# Altium PCB pcb.PcbDoc (part 3 of 6)
Units mm, origin at the board's own origin, x right, y up, seen from the top; angles counter-clockwise.
Board outline 163.6 x 137.4 mm, 4 copper layers (Top Layer, GND2, GND3, Bottom Layer), stack 1.586 mm thick; 362 components, 323 nets, 1261 pads, 657 vias.
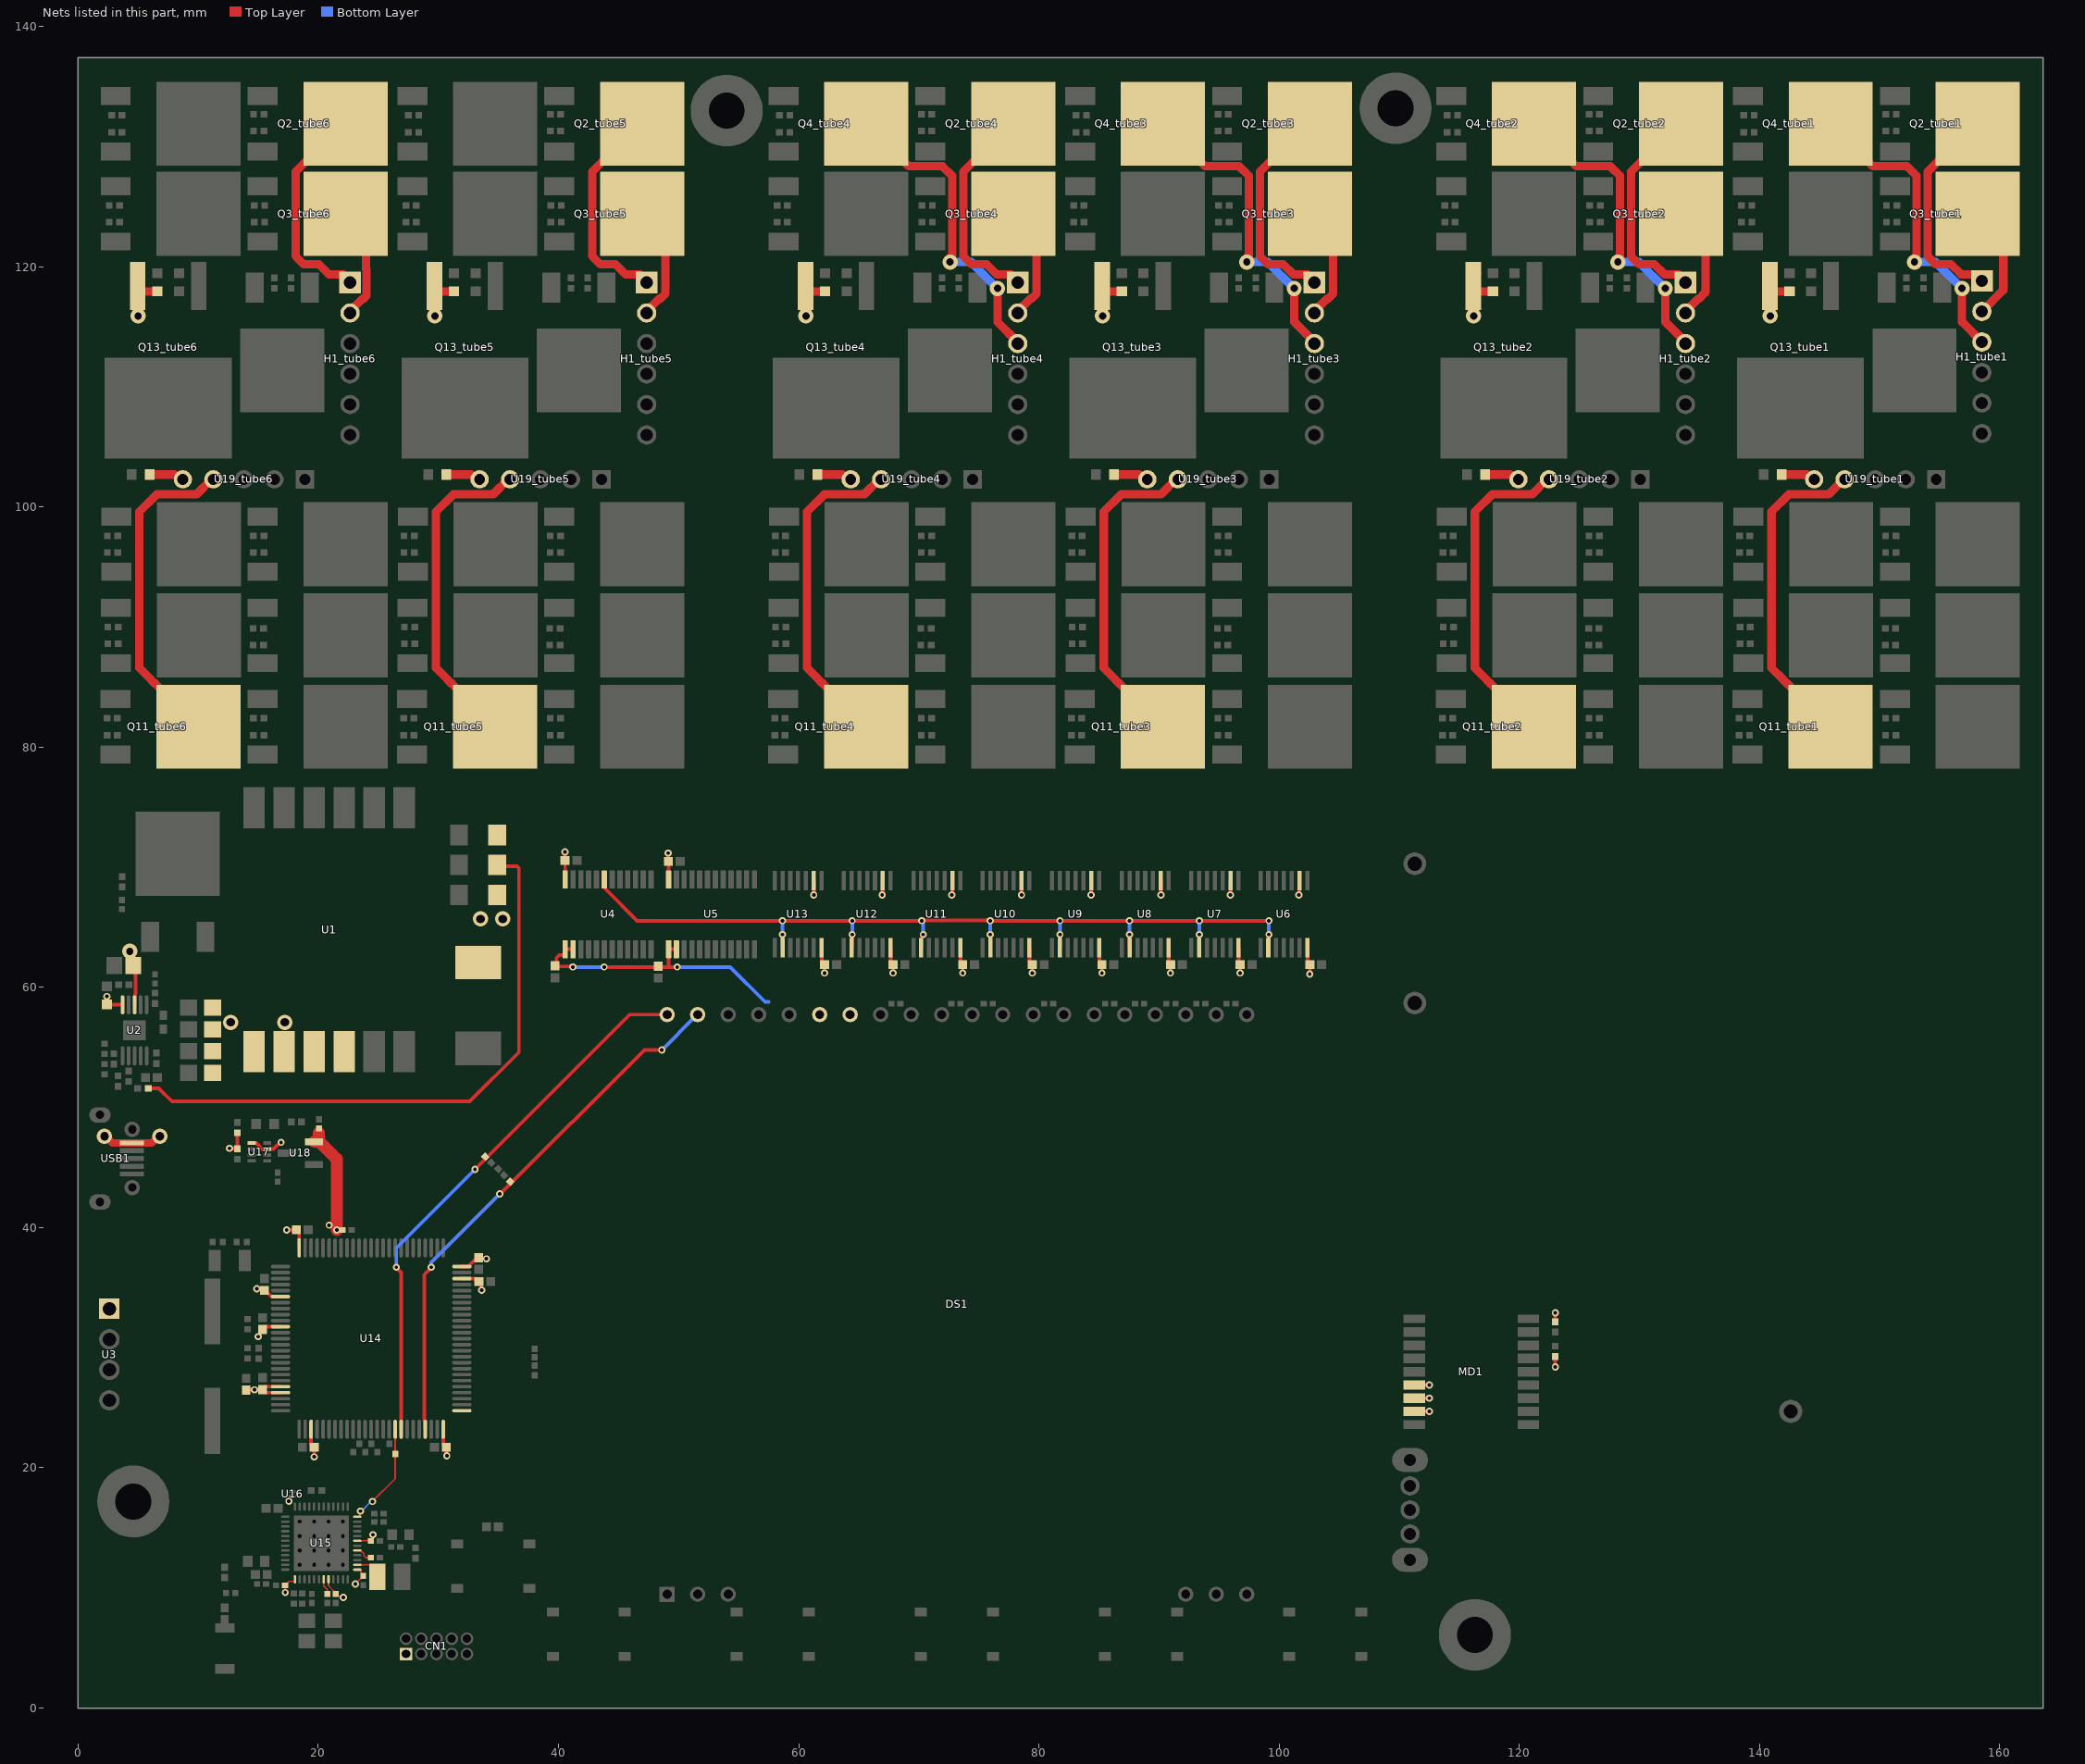
[diagram p4: the nets of this part, all layers, seen from the top]

## Via types
v1: diameter 0.6, hole 0.3, Top Layer to Bottom Layer, 545 vias
v2: diameter 1.27, hole 0.6, Top Layer to Bottom Layer, 97 vias
v3: diameter 1.27, hole 0.711, Top Layer to Bottom Layer, 13 vias
v4: diameter 0.5, hole 0.2, Top Layer to Bottom Layer, 2 vias

## Nets (pads, with @x,y where several pads share a name; then routed paths per layer and width w, separated by ;. In a path a pad name is that pad's centre, name@x,y a point inside that pad or via, vN(x,y) a via of type N, cw(c..) or ccw(c..) an arc to the next point about the centre after c; other vN are vias at no path point) (continued)
AN_COMMON_tube5: R35_tube5.2 U19_tube5.5 | length 2.9
  Top Layer w0.7: R35_tube5.2@30.653,102.7 32.732,102.7 33.127,102.304 U19_tube5.5@33.35,102.304
AN_COMMON_tube6: R35_tube6.2 U19_tube6.5 | length 2.9
  Top Layer w0.7: R35_tube6.2@5.953,102.7 8.032,102.7 8.427,102.304 U19_tube6.5@8.65,102.304
BUCKOUT: L1.1 U15.26 | length 2.3
  Top Layer w0.127: U15.26@23.248,11.923 24.309,11.923 24.923,11.309 L1.1@24.923,10.923
BUCKVMID: C50.1 U15.29 | length 1.5
  Top Layer w0.127: U15.29@23.248,13.123 23.509,13.123 23.789,12.843 23.789,12.683 23.948,12.523 C50.1@24.37,12.523
CATH_0_tube1: Q11_tube1.4 U19_tube1.4 | length 27.2
  Top Layer w0.7: Q11_tube1.4@145.91,81.7 142.287,85.323 142.26,85.323 141.981,85.603 141.981,85.629 141,86.61 141,99.607 142.458,101.066 145.767,101.066 147.006,102.304 U19_tube1.4@147.09,102.304
CATH_0_tube2: Q11_tube2.4 U19_tube2.4 | length 27.2
  Top Layer w0.7: Q11_tube2.4@121.21,81.7 117.587,85.323 117.56,85.323 117.281,85.603 117.281,85.629 116.3,86.61 116.3,99.607 117.758,101.066 121.067,101.066 122.306,102.304 U19_tube2.4@122.39,102.304
CATH_0_tube3: Q11_tube3.4 U19_tube3.4 | length 27.2
  Top Layer w0.7: Q11_tube3.4@90.31,81.7 86.687,85.323 86.66,85.323 86.381,85.603 86.381,85.629 85.4,86.61 85.4,99.607 86.858,101.066 90.167,101.066 91.406,102.304 U19_tube3.4@91.49,102.304
CATH_0_tube4: Q11_tube4.4 U19_tube4.4 | length 27.2
  Top Layer w0.7: Q11_tube4.4@65.61,81.7 61.987,85.323 61.96,85.323 61.681,85.603 61.681,85.629 60.7,86.61 60.7,99.607 62.158,101.066 65.467,101.066 66.706,102.304 U19_tube4.4@66.79,102.304
CATH_0_tube5: Q11_tube5.4 U19_tube5.4 | length 27.2
  Top Layer w0.7: Q11_tube5.4@34.71,81.7 31.087,85.323 31.06,85.323 30.781,85.603 30.781,85.629 29.8,86.61 29.8,99.607 31.258,101.066 34.567,101.066 35.806,102.304 U19_tube5.4@35.89,102.304
CATH_0_tube6: Q11_tube6.4 U19_tube6.4 | length 27.2
  Top Layer w0.7: Q11_tube6.4@10.01,81.7 6.387,85.323 6.36,85.323 6.081,85.603 6.081,85.629 5.1,86.61 5.1,99.607 6.558,101.066 9.867,101.066 11.106,102.304 U19_tube6.4@11.19,102.304
CATH_1_tube1: H1_tube1.1 Q2_tube1.4 | length 18.2
  Top Layer w0.7: Q2_tube1.4@158.169,131.9 155.019,128.75 154.845,128.75 154,127.905 154,120.895 154.687,120.207 155.942,120.207 156.78,119.37 157.969,119.37 H1_tube1.1@158.519,118.82
CATH_1_tube2: H1_tube2.1 Q2_tube2.4 | length 18.2
  Top Layer w0.7: Q2_tube2.4@133.469,131.9 130.319,128.75 130.145,128.75 129.3,127.905 129.3,120.895 129.987,120.207 131.242,120.207 132.08,119.37 133.269,119.37 H1_tube2.1@133.819,118.82
CATH_1_tube3: H1_tube3.1 Q2_tube3.4 | length 18.2
  Top Layer w0.7: Q2_tube3.4@102.569,131.9 99.419,128.75 99.245,128.75 98.4,127.905 98.4,120.895 99.087,120.207 100.342,120.207 101.18,119.37 102.369,119.37 H1_tube3.1@102.919,118.82
CATH_1_tube4: H1_tube4.1 Q2_tube4.4 | length 18.2
  Top Layer w0.7: Q2_tube4.4@77.869,131.9 74.719,128.75 74.545,128.75 73.7,127.905 73.7,120.895 74.387,120.207 75.642,120.207 76.48,119.37 77.669,119.37 H1_tube4.1@78.219,118.82
CATH_1_tube5: H1_tube5.1 Q2_tube5.4 | length 18.2
  Top Layer w0.7: Q2_tube5.4@46.969,131.9 43.819,128.75 43.645,128.75 42.8,127.905 42.8,120.895 43.487,120.207 44.742,120.207 45.58,119.37 46.769,119.37 H1_tube5.1@47.319,118.82
CATH_1_tube6: H1_tube6.1 Q2_tube6.4 | length 18.2
  Top Layer w0.7: Q2_tube6.4@22.269,131.9 19.119,128.75 18.945,128.75 18.1,127.905 18.1,120.895 18.787,120.207 20.042,120.207 20.88,119.37 22.069,119.37 H1_tube6.1@22.619,118.82
CATH_2_tube1: H1_tube1.2 Q3_tube1.4 | length 9.7
  Top Layer w0.7: Q3_tube1.4@158.169,124.4 160.3,122.269 160.3,118.061 H1_tube1.2@158.519,116.28
CATH_2_tube2: H1_tube2.2 Q3_tube2.4 | length 9.7
  Top Layer w0.7: Q3_tube2.4@133.469,124.4 135.5,122.369 135.5,117.879 134.936,117.316 134.855,117.316 H1_tube2.2@133.819,116.28
CATH_2_tube3: H1_tube3.2 Q3_tube3.4 | length 9.6
  Top Layer w0.7: Q3_tube3.4@102.569,124.4 104.5,122.469 104.5,117.779 104.036,117.316 103.955,117.316 H1_tube3.2@102.919,116.28
CATH_2_tube4: H1_tube4.2 Q3_tube4.4 | length 9.6
  Top Layer w0.7: Q3_tube4.4@77.869,124.4 79.8,122.469 79.8,117.78 79.336,117.316 79.255,117.316 H1_tube4.2@78.219,116.28
CATH_2_tube5: H1_tube5.2 Q3_tube5.4 | length 9.6
  Top Layer w0.7: Q3_tube5.4@46.969,124.4 48.9,122.469 48.9,117.779 48.436,117.316 48.355,117.316 H1_tube5.2@47.319,116.28
CATH_2_tube6: H1_tube6.2 Q3_tube6.4 | length 9.5
  Top Layer w0.7: Q3_tube6.4@22.269,124.4 23.984,122.685 23.984,119.821 24.016,119.79 24.016,117.595 23.736,117.316 23.655,117.316 H1_tube6.2@22.619,116.28
CATH_3_tube1: H1_tube1.3 Q4_tube1.4 | length 26.2
  Top Layer w0.7: Q4_tube1.4@145.925,131.9 149.448,128.377 149.818,128.377 149.822,128.373 152.271,128.373 153.085,127.559 153.085,120.988 153.009,120.912 153.009,120.509 v2(152.9,120.4) ; v2(156.857,118.2) 156.857,115.402 H1_tube1.3@158.519,113.74
  Bottom Layer w0.7: v2(152.9,120.4) 154.657,120.4 v2(156.857,118.2)
CATH_3_tube2: H1_tube2.3 Q4_tube2.4 | length 26.2
  Top Layer w0.7: Q4_tube2.4@121.225,131.9 124.748,128.377 125.118,128.377 125.122,128.373 127.571,128.373 128.385,127.559 128.385,120.988 128.309,120.912 128.309,120.509 v2(128.2,120.4) ; v2(132.157,118.2) 132.157,115.402 H1_tube2.3@133.819,113.74
  Bottom Layer w0.7: v2(128.2,120.4) 129.957,120.4 v2(132.157,118.2)
CATH_3_tube3: H1_tube3.3 Q4_tube3.4 | length 26.2
  Top Layer w0.7: Q4_tube3.4@90.325,131.9 93.848,128.377 94.218,128.377 94.222,128.373 96.671,128.373 97.485,127.559 97.485,120.988 97.409,120.912 97.409,120.509 v2(97.3,120.4) ; v2(101.257,118.2) 101.257,115.402 H1_tube3.3@102.919,113.74
  Bottom Layer w0.7: v2(97.3,120.4) 99.057,120.4 v2(101.257,118.2)
CATH_3_tube4: H1_tube4.3 Q4_tube4.4 | length 26.2
  Top Layer w0.7: Q4_tube4.4@65.625,131.9 69.148,128.377 69.518,128.377 69.522,128.373 71.971,128.373 72.785,127.559 72.785,120.988 72.709,120.912 72.709,120.509 v2(72.6,120.4) ; v2(76.557,118.2) 76.557,115.402 H1_tube4.3@78.219,113.74
  Bottom Layer w0.7: v2(72.6,120.4) 74.357,120.4 v2(76.557,118.2)